# EAGLE board MucDuino_Banana (EAGLE 6.3)
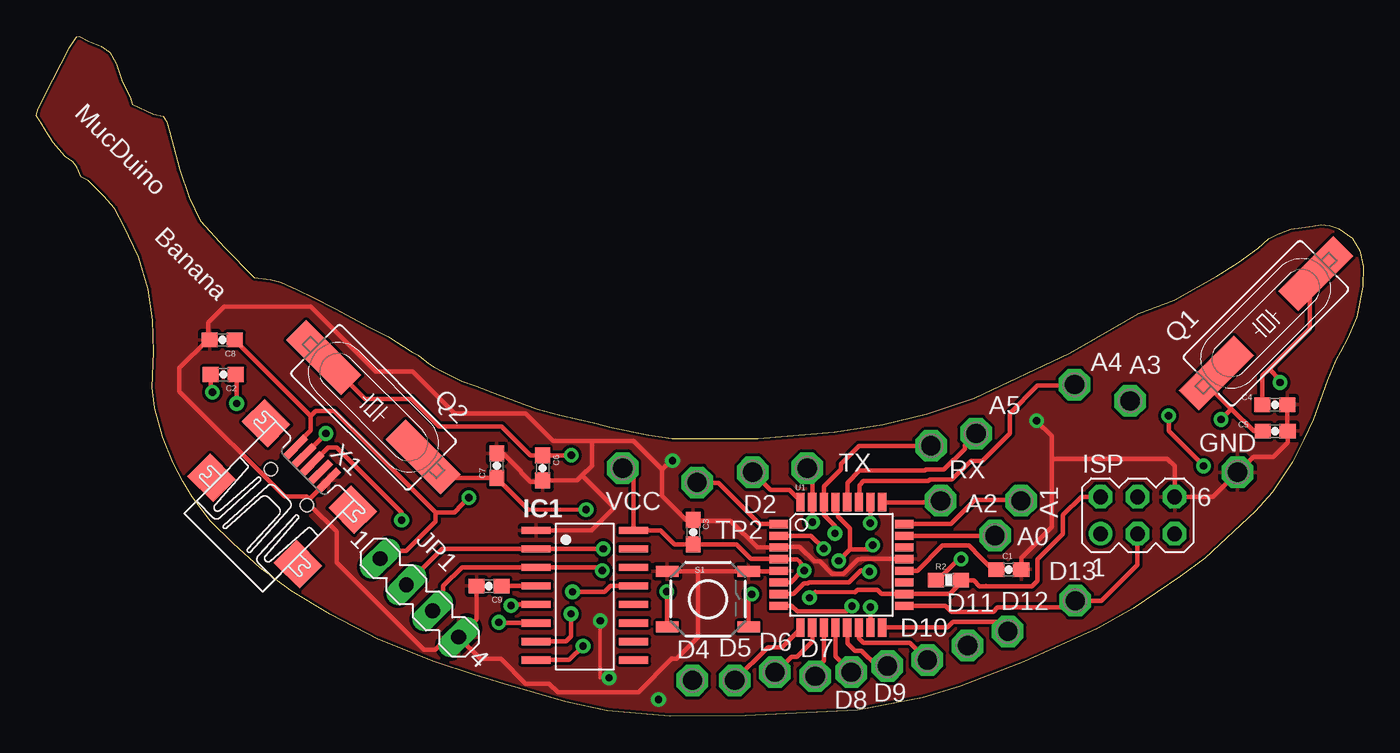
[diagram p0: board, top side]
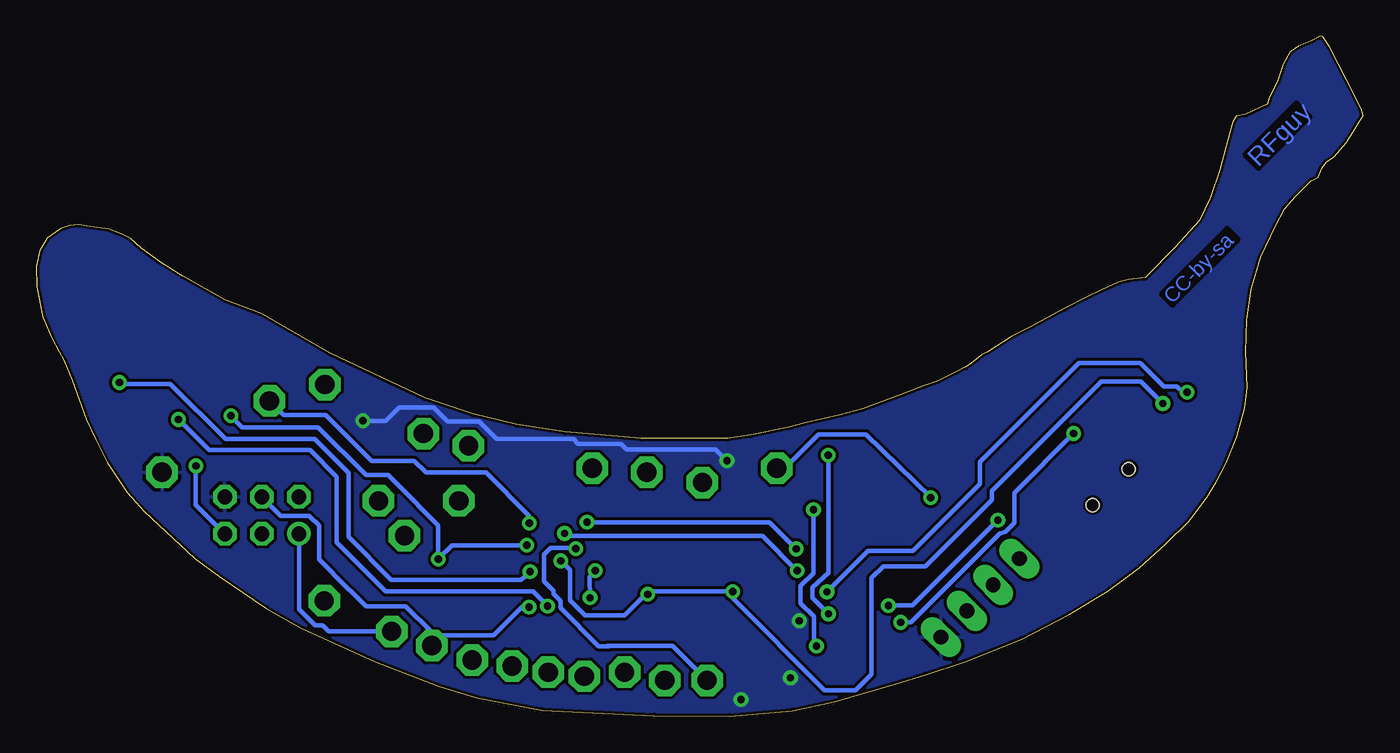
[diagram p1: board, bottom side, seen from below]

Size 91.01 x 46.65 mm. Coordinates in mm from the lower left corner, seen from the top.
Outline: 12.93,32.15 14.95,30.1 16.08,29.96 16.74,29.79 17.9,29.27 19.02,28.72 20.48,27.96 22.9,26.69 24.11,26.06 25.77,25 26.2,24.78 26.89,24.22 27.28,23.96 27.87,23.64 29.15,23.02 30.15,22.66 31.67,22.09 34.35,21.1 35.88,20.68 38.27,20.14 39.44,19.83 42,19.3 43.59,19.06 49.49,19.06 54.74,19.5 58.08,20.01 61.06,20.73 64.36,21.83 70.89,24.91 75.61,27.64 78.05,28.57 80.97,30.19 82.44,31.13 83.82,32.11 84.54,32.79 85.17,33.09 86.05,33.43 87.56,33.65 88.12,33.72 88.72,33.68 89.34,33.47 90.27,32.8 90.8,31.97 91.01,30.85 90.99,29.48 90.58,27.38 89.97,25.95 89.45,25.01 89.13,24.43 88.57,23.04 87.6,20.35 86.95,19 86.16,17.41 84.78,15.37 83.63,14.05 80.14,10.84 78.48,9.61 75.24,7.41 72.83,6.03 67.73,3.72 63.38,2.04 60.79,1.26 56.33,0.41 48.63,0.04 43.45,0 39.16,0.38 36.3,0.98 32.05,2.22 30.03,2.85 27.3,3.75 23.44,5.29 20.14,7 17.46,8.6 15.35,10.18 13.52,11.82 11.97,13.36 10.67,15.06 10.06,16.09 9.38,17.37 8.65,19.17 8.1,21.16 7.94,22.57 8.04,25 7.99,27.18 7.68,29.31 7,31.51 5.99,33.68 5.37,34.85 4.63,35.68 3.78,36.5 3.55,36.76 3.07,36.99 2.81,37.65 2.52,38.03 1.97,38.39 1.14,39.35 0.66,40.1 0.26,40.79 0,41.21 0.11,41.68 1.11,43.65 2.28,45.9 2.77,46.64 2.94,46.65 3.57,46.33 4.45,45.97 5.03,45.56 5.48,44.77 5.89,43.55 6.42,42.48 6.57,42 8.04,41.31 8.69,41.19 8.95,40.79 9.13,40.07 9.81,37.5 10.48,35.6 11.25,34 12.93,32.15
Copper layers (1*16): Top 0.035mm / dielectric 1.5mm / Bottom 0.035mm
Design rules "SparkFun-2-layer *": minimum track width 7mil, minimum drill 15mil, track to track 8mil, track to pad 8mil, pad to pad 8mil, via to via 8mil, smd to smd 8mil, copper to edge 8mil, drill to drill 8mil, minimum pad ring 12mil, minimum via ring 10mil, stop-mask expansion 4mil, vias tented up to drill 20mil, thermal gap 10mil
Net classes: 0 default: width 0.203 mm; 1 vcc: width 0.254 mm

## Footprints (pad centres in the part's own frame; a part is rotated, then mirrored left to right if it is on the bottom)
P1-13 = drill 1.321 pad 2.159 octagon: TP 0,0
0603-CAP = smd 1.1 x 1: 1 -0.85,0; 2 0.85,0
SOP16-209MM = smd 2 x 0.5: P$1 -3.34,4.54; P$2 -3.34,3.27; P$3 -3.34,2; P$4 -3.34,0.73; P$5 -3.34,-0.54; P$6 -3.34,-1.81; P$7 -3.34,-3.08; P$8 -3.34,-4.35; P$9 3.34,-4.35; P$10 3.34,-3.08; P$11 3.34,-1.81; P$12 3.34,-0.54; P$13 3.34,0.73; P$14 3.34,2; P$15 3.34,3.27; P$16 3.34,4.54
MA03-2 = drill 1.016: 1 -2.54,-1.27 | drill 1.016 octagon: 2 -2.54,1.27; 3 0,-1.27; 4 0,1.27; 5 2.54,-1.27; 6 2.54,1.27
MA04-1 = drill 1.016 long: 1 -3.81,0; 2 -1.27,0; 3 1.27,0; 4 3.81,0
HC49UP = smd 5.334 x 1.93: 1 -4.826,0; 2 4.826,0
0603-RES = smd 1.1 x 1: 1 -0.85,0; 2 0.85,0
TACTILE-SWITCH-SMD-ALT01 = smd 1.524 x 0.762: 1 -2.794,1.905; 2 2.794,1.905; 3 -2.794,-1.905; 4 2.794,-1.905
TQFP32-08 = smd 1.27 x 0.559: 1 -4.293,2.8; 2 -4.293,2; 3 -4.293,1.2; 4 -4.293,0.4; 5 -4.293,-0.4; 6 -4.293,-1.2; 7 -4.293,-2; 8 -4.293,-2.8; 17 4.293,-2.8; 18 4.293,-2; 19 4.293,-1.2; 20 4.293,-0.4; 21 4.293,0.4; 22 4.293,1.2; 23 4.293,2; 24 4.293,2.8 | smd 0.559 x 1.27: 9 -2.8,-4.293; 10 -2,-4.293; 11 -1.2,-4.293; 12 -0.4,-4.293; 13 0.4,-4.293; 14 1.2,-4.293; 15 2,-4.293; 16 2.8,-4.293; 25 2.8,4.293; 26 2,4.293; 27 1.2,4.293; 28 0.4,4.293; 29 -0.4,4.293; 30 -1.2,4.293; 31 -2,4.293; 32 -2.8,4.293
UX60-MB-5ST = smd 2 x 0.5: 1 2.25,1.6; 2 2.25,0.8; 3 2.25,0; 4 2.25,-0.8; 5 2.25,-1.6 | smd 2.2 x 2.5: M1 -3.3,-4.2; M2 -3.3,4.2; M3 2,4.2; M4 2,-4.2 | hole 0.9: 0,-1.75; 0,1.75

## Placement (x,y rotation side)
A0  TPPAD1-13  [P1-13]  65.76,12.4 270 top
A1  TPPAD1-13  [P1-13]  67.54,14.78 270 top
A2  TPPAD1-13  [P1-13]  62.04,14.78 270 top
A3  TPPAD1-13  [P1-13]  75.02,21.64 270 top
A4  TPPAD1-13  [P1-13]  71.22,22.76 270 top
A5  TPPAD1-13  [P1-13]  64.46,19.4 270 top
C1  0.1uF  [0603-CAP]  66.7,10.06 180 top
C2  0.1uF  [0603-CAP]  12.82,23.45 180 top
C3  0.1uF  [0603-CAP]  45.05,12.63 270 top
C4  18p  [0603-CAP]  84.96,21.38 0 top
C5  18p  [0603-CAP]  84.98,19.56 0 top
C6  18p  [0603-CAP]  34.72,17.03 270 top
C7  18p  [0603-CAP]  31.58,17.19 90 top
C8  0.1uF  [0603-CAP]  12.75,25.82 180 top
C9  0.1uF  [0603-CAP]  31.05,8.93 180 top
D2  TPPAD1-13  [P1-13]  49.14,16.74 270 top
D4  TPPAD1-13  [P1-13]  45,2.46 270 top
D5  TPPAD1-13  [P1-13]  47.9,2.46 270 top
D6  TPPAD1-13  [P1-13]  50.66,3.02 270 top
D7  TPPAD1-13  [P1-13]  53.42,2.74 270 top
D8  TPPAD1-13  [P1-13]  55.9,3.02 270 top
D9  TPPAD1-13  [P1-13]  58.38,3.45 270 top
D10  TPPAD1-13  [P1-13]  61.12,3.86 270 top
D11  TPPAD1-13  [P1-13]  63.88,4.84 270 top
D12  TPPAD1-13  [P1-13]  66.64,5.82 270 top
D13  TPPAD1-13  [P1-13]  71.27,7.92 270 top
GND  TPPAD1-13  [P1-13]  82.4,16.74 270 top
IC1  [SOP16-209MM]  37.62,8.21 0 top
ISP  [MA03-2]  75.54,13.79 0 top
JP1  [MA04-1]  26.27,8.12 315 top
Q1  16 MHz  [HC49UP]  84.35,26.97 45 top
Q2  12 MHz  [HC49UP]  23.13,21.19 135 top
R2  10K  [0603-RES]  62.57,9.35 0 top
RX  TPPAD1-13  [P1-13]  61.37,18.56 270 top
S1  Reset  [TACTILE-SWITCH-SMD-ALT01]  46.07,8.03 0 top
TP2  TPPAD1-13  [P1-13]  45.32,16.04 270 top
TX  TPPAD1-13  [P1-13]  52.87,17.02 270 top
U1  ATMEGA328  [TQFP32-08]  55.22,10.38 0 top
VCC  TPPAD1-13  [P1-13]  40.22,17.02 270 top
X1  MINI-USB-UX60-MB-5ST  [UX60-MB-5ST]  17.31,15.73 45 top

## Library data of the parts
A0 A1-A5 D2 D4-D13 GND RX TP2 TX VCC = testpad
C1-C9 R2 U1 = SparkFun
IC1 = densikit
ISP JP1 = con-lstb; OC_FARNELL: unknown; OC_NEWARK: unknown
Q1 Q2 = crystal; OC_FARNELL: unknown; OC_NEWARK: unknown
S1 = Testing
X1 = con-hirose; OC_FARNELL: unknown; OC_NEWARK: unknown

## Nets
A0: A0.TP U1.23
A1: A1.TP U1.24
A2: A2.TP U1.25
A3: A3.TP U1.26
A4: A4.TP U1.27
A5: A5.TP U1.28
A6: U1.19
A7: U1.22
AREF: C1.2 U1.20
D2: D2.TP U1.32
D3: TP2.TP U1.1
D4: D4.TP U1.2
D5: D5.TP U1.9
D6: D6.TP U1.10
D7: D7.TP U1.11
D8: D8.TP U1.12
D9: D9.TP U1.13
D10: D10.TP U1.14
DTR: C2.2 IC1.P$13
GND [vcc]: C1.1 C3.1 C4.2 C5.2 C6.2 C7.2 C8.2 C9.2 GND.TP IC1.P$1 ISP.6 JP1.4 S1.1 S1.2 U1.3 U1.5 U1.21 X1.5
MISO: D12.TP ISP.1 U1.16
MOSI: D11.TP ISP.4 U1.15
N$1: C5.1 Q1.1 U1.8
N$2: C4.1 Q1.2 U1.7
N$3: C9.1 IC1.P$4
N$5: C6.1 IC1.P$7 Q2.2
N$6: C7.1 IC1.P$8 Q2.1
N$8: IC1.P$5 X1.3
N$9: IC1.P$6 X1.2
RESET: C2.1 ISP.5 R2.1 S1.3 S1.4 U1.29
RXI: IC1.P$3 JP1.3 RX.TP U1.30
SCK: D13.TP ISP.3 U1.17
TXO: IC1.P$2 JP1.2 TX.TP U1.31
VCC: C3.2 C8.1 IC1.P$16 ISP.2 JP1.1 R2.2 U1.4 U1.6 U1.18 VCC.TP X1.1

## Tracks (layer width: path | path; a pad name or v marks a point on that pad's centre or on a via)
A0
  Top 0.305: U1.23 65.74,12.38 A0.TP
A1
  Top 0.305: U1.24 62.72,13.18 64.37,14.83 67.49,14.83 A1.TP
A2
  Top 0.305: U1.25 62.01,14.67 62.16,14.82 62.08,14.82 A2.TP
A3  (via drill 0.5)
  Top 0.305: U1.26 57.22,13.26 v57.2,13.24
  Bottom 0.305: v57.2,13.24 57.2,13.74 60.18,16.72 64.29,16.72 65.09,17.52 68.03,17.52 71.18,20.67 74.05,20.67 A3.TP
A4
  Top 0.305: U1.27 56.42,14.79 | 56.42,14.79 56.42,15.05 | A4.TP 71.14,22.68 68.68,22.68 66.79,20.79 66.79,19.42 64.9,17.53 64.09,17.53 62.81,16.25 61.28,16.25 61.18,16.15 56.75,16.15 56.45,15.85 56.45,14.82 56.42,14.79
A5
  Top 0.305: U1.28 55.62,16.01 56.47,16.86 60.96,16.86 61.03,16.93 62.27,16.93 63.69,18.35 63.69,18.63 A5.TP
AREF
  Top 0.305: U1.20 60.43,9.98 62.16,11.71 63.96,11.71 64.78,10.89 65.71,9.94 C1.2
D2
  Top 0.305: U1.32 52.42,14.78 51.66,15.54 50.34,15.54 D2.TP
D3
  Top 0.305: U1.1 49.62,13.18 46.78,16.02 45.34,16.02 TP2.TP
D4  (via drill 0.5)
  Top 0.305: U1.2 53.14,12.38 v54.01,11.51
  Bottom 0.305: v54.01,11.5 v54.01,11.51 54.04,11.54 55.74,11.54 56.18,11.1 56.18,9.27 55.53,8.62 55.53,8.4 55.06,7.93 55.06,7.43 52.44,4.81 51.68,4.81 51.67,4.82 | 51.82,4.82 51.67,4.82 | 51.67,4.82 47.36,4.82 D4.TP
D5
  Top 0.305: U1.9 52.42,6.01 51.15,4.74 50.18,4.74 D5.TP
D6
  Top 0.305: U1.10 53.22,5.13 52.17,4.08 51.79,4.08 50.61,2.9 50.61,2.97 D6.TP
D7
  Top 0.305: U1.11 54.02,3.8 53.41,3.19 D7.TP
D8
  Top 0.305: U1.12 54.82,4.1 D8.TP
D9
  Top 0.305: U1.13 55.62,5 55.64,5 56.14,4.5 56.6,4.5 57.65,3.45 58.35,3.45 58.37,3.43 58.25,3.43 D9.TP
D10
  Top 0.305: U1.14 56.42,5.34 56.72,5.04 59.94,5.04 D10.TP
DTR  (via drill 0.5)
  Top 0.305: IC1.P$13 39.38,8.94 38.98,8.54 v36.78,8.54 | v12.08,22.24 11.97,22.35 C2.2
  Bottom 0.305: v36.78,8.54 33.98,11.34 30.88,11.34 26.28,15.94 26.28,17.44 19.48,24.24 15.28,24.24 13.68,22.64 12.78,22.64 12.38,22.24 v12.08,22.24
GND  (via drill 0.5)
  Top 0.254: v39.28,2.64 38.68,2.64 v38.68,6.54
  Top 0.305: C7.2 32.01,18.04 33.26,16.79 33.26,16.73 33.9,16.09 34.5,16.09 | 34.5,16.09 34.63,16.09 C6.2 | C9.2 30.2,6.66 JP1.4 | JP1.4 28.24,5.43 27.35,4.54 26.59,4.54 20.58,10.55 20.58,12.68 18.79,14.47 18.79,14.82 | 18.79,14.82 18.79,14.94 X1.5 | U1.3 50.68,11.58 | 50.68,11.58 49.47,11.58 47.63,13.42 44.97,13.42 44.94,13.39 44.96,13.39 C3.1 44.57,13.48 42.93,15.12 42.93,16.94 | 42.93,16.94 40.97,18.9 38.11,18.9 | 37.43,16.51 38.11,17.19 38.11,18.9 | 37.43,16.51 37.09,16.17 34.58,16.17 34.5,16.09 | C8.2 11.79,25.82 | 11.79,25.82 11.74,25.82 9.8,23.88 9.8,22.3 17.02,15.08 18.53,15.08 18.79,14.82 | IC1.P$1 38.07,12.75 39.52,14.2 39.52,14.42 37.43,16.51 | 38.11,18.9 35.43,18.9 33.57,20.76 28.7,20.76 25.81,23.65 23.28,23.65 18.81,28.12 12.88,28.12 11.77,27.01 11.77,25.84 11.79,25.82 | 43.6,3.96 43.58,3.94 | 43.58,3.94 41.29,1.65 35.77,1.65 35.18,2.24 33.57,2.24 31.87,3.94 30.46,3.94 JP1.4 | U1.5 51,10.05 51.13,10.05 51.02,9.94 S1.2 45.48,9.94 | S1.1 45.48,9.94 | 43.58,3.94 43.9,3.94 45.39,5.43 45.39,9.85 45.48,9.94 | U1.21 56.56,10.78 56.55,10.77 56.36,10.77 55.37,9.78 54.58,9.78 53.74,10.62 53.36,10.62 52.36,11.62 50.72,11.62 50.68,11.58 | C1.1 67.55,10.87 69.66,12.98 69.66,17.8 | 69.66,17.8 69.66,19.22 v68.61,20.27 | v43.63,17.53 43.52,17.53 42.93,16.94 | C4.2 85.81,19.58 C5.2 85.83,18.77 84.86,17.8 83.47,17.8 82.26,16.59 82.26,16.6 GND.TP 80.72,15.06 ISP.6 78.08,17.17 77.58,17.67 69.79,17.67 69.66,17.8
  Bottom 0.305: v68.61,20.27 67.05,20.27 66.13,21.19 63.77,21.19 62.82,20.24 60.66,20.24 59.43,19.01 54.18,19.01 53.86,18.69 50.89,18.69 50.52,18.32 44.42,18.32 v43.63,17.53
  other vias: 42.68,1.14
  pour Bottom: -3.22,49.14 97.08,49.14 97.08,-3.86 -3.22,-3.86
  pour Top: -1.72,51.84 97.28,51.84 97.28,-4.46 -1.72,-4.46
MISO
  Top 0.305: U1.16 62.48,6.09 62.86,6.47 65.99,6.47 D12.TP
  Bottom 0.305: D12.TP 70.98,5.82 71.38,6.22 71.89,6.22 72.99,7.32 ISP.1
MOSI  (via drill 0.5)
  Top 0.305: U1.15 57.22,7.48 v57.21,7.49
  Bottom 0.305: v57.21,7.49 57.71,7.49 59.64,5.56 63.16,5.56 D11.TP 63.88,5.74 65.67,7.53 68.4,7.53 70.65,9.78 70.65,9.79 71.63,10.77 71.63,13.08 72.3,13.75 74.27,13.75 75.67,15.15 75.67,15 75.61,14.94 75.61,14.99 ISP.4
N$1  (via drill 0.5)
  Top 0.305: C5.1 83.51,19.56 81.98,21.09 | 81.98,21.09 80.19,22.88 80.26,22.88 Q1.1 | v81.26,20.36 81.26,20.38 81.98,21.09 | U1.8 51.81,7.58 52.2,7.19 55.57,7.19 v55.94,7.56
  Bottom 0.305: v55.94,7.56 56.09,7.7 56.09,7.72 56.95,8.58 67.04,8.58 70.4,11.94 70.4,16.41 72.25,18.26 79.16,18.26 v81.26,20.36
N$2  (via drill 0.5)
  Top 0.305: C4.1 84.11,23.37 84.57,23.83 | 84.57,23.83 87.35,26.61 87.35,30.3 87.46,30.41 87.72,30.41 87.89,30.24 87.68,30.24 87.63,30.29 87.67,30.29 Q1.2 | v85.31,22.9 85.31,23.09 84.57,23.83 | v57.15,9.92 57.05,10.02 56.57,10.02 55.73,9.18 53.01,9.18 52.94,9.11 52.64,9.11 51.92,8.39 U1.7
  Bottom 0.305: v57.15,9.92 57.49,9.61 57.75,9.36 66.68,9.37 69.61,12.3 69.61,16.7 71.92,19.01 78.03,19.01 81.82,22.8 85.21,22.8 v85.31,22.9
N$3
  Top 0.305: C9.1 IC1.P$4
N$5  (via drill 0.5)
  Top 0.305: Q2.2 19.61,24.71 19.57,24.71 19.79,24.49 19.82,24.49 22.54,21.77 25.73,21.77 27.63,19.87 31.92,19.87 33.91,17.88 C6.1 34.87,17.88 34.9,17.91 v36.7,17.91 | IC1.P$7 36.32,5.13 36.68,5.49 v36.68,7.02
  Bottom 0.305: v36.68,7.02 37.78,8.12 37.78,8.84 36.68,9.84 36.68,17.74 36.7,17.76 v36.7,17.91
N$6  (via drill 0.5)
  Top 0.305: Q2.1 27.98,16.34 C7.1 33.77,14.15 v37.7,14.18 | IC1.P$8 36.55,3.86 v37.5,4.81
  Bottom 0.305: 37.5,14.15 v37.7,14.18 37.7,9.82 38.58,8.94 38.58,7.74 37.68,6.84 37.68,4.99 v37.5,4.81
N$8  (via drill 0.5)
  Top 0.305: IC1.P$5 32.63,7.67 v32.56,7.6 | v25.05,13.46 25.05,13.98 20.59,18.44 20.02,18.44 X1.3
  Bottom 0.305: v32.56,7.6 30.91,7.6 v25.05,13.46
N$9  (via drill 0.5)
  Top 0.305: IC1.P$6 31.76,6.4 v31.72,6.44 | v19.86,19.4 19.69,19.24 X1.2
  Bottom 0.305: v31.72,6.44 31.02,6.44 24.92,12.54 24.53,12.64 23.91,13.26 23.91,15.34 v19.86,19.4
RESET  (via drill 0.5)
  Top 0.305: U1.29 54.76,14.61 54.76,14.07 54.99,13.84 54.99,13.72 55.82,12.89 55.82,11.46 | 43.22,8.58 v43.24,8.56 43.27,8.53 S1.3 | v13.74,21.46 13.74,23.38 C2.1 | S1.4 48.86,8.16 v49.07,8.37 | 55.82,11.46 v55.04,10.66 | 55.82,11.46 57.09,11.46 v57.37,11.74 | R2.1 61.85,9.35 63.37,10.86 v63.44,10.79 | v77.67,20.62 77.67,19.57 v80.07,17.17
  Bottom 0.305: v49.07,8.37 49.22,8.37 | v13.74,21.46 15.26,22.98 17.94,22.98 25.47,15.45 25.47,14.85 30.02,10.3 32.91,10.3 33.71,9.5 33.71,2.89 34.81,1.79 36.94,1.79 43.24,8.09 v43.24,8.56 49.03,8.56 49.22,8.37 | v55.04,10.66 54.42,10.06 54.42,7.96 53.37,6.91 50.68,6.91 49.22,8.37 | v57.37,11.74 62.49,11.74 v63.44,10.79 63.44,13.08 64.85,14.49 64.85,14.52 66.88,16.55 68.39,16.55 71.67,19.83 76.88,19.83 v77.67,20.62 | v80.07,17.17 80.07,14.51 ISP.5
RXI  (via drill 0.5)
  Top 0.305: JP1.3 27.91,7.96 27.91,8.93 29.19,10.21 IC1.P$3 38.59,10.21 v38.81,9.99 | v54.78,12.55 54.78,13.05 54.01,13.82 U1.30 54.02,15.77 55.2,16.95 55.2,17.3 56.44,18.54 61.35,18.54 RX.TP
  Bottom 0.305: v38.81,9.99 v38.82,9.99 41.2,12.37 54.6,12.37 v54.78,12.55
SCK
  Top 0.305: ISP.3 75.54,10.4 73.06,7.92 D13.TP 70.81,7.46 65.93,7.46 65.64,7.17 62.77,7.17 62.36,7.58 U1.17
TXO  (via drill 0.5)
  Top 0.305: TX.TP 53.22,16.67 U1.31 53.22,13.33 v53.24,13.31 | JP1.2 27.83,11.48 IC1.P$2 v38.89,11.48
  Bottom 0.305: v53.24,13.31 40.72,13.31 v38.89,11.48
VCC  (via drill 0.5)
  Top 0.305: X1.1 17.77,18.58 18.81,19.62 18.81,20.61 | 18.81,20.61 C8.1 | 52.46,9.89 52.46,10.49 52.33,10.62 52.33,10.63 52.18,10.78 U1.4 49.03,10.79 48.04,11.78 C3.2 45.09,11.74 45.28,11.74 45.22,11.8 43.78,11.8 42.83,12.75 IC1.P$16 40.96,16.28 VCC.TP | JP1.1 24.02,10.82 24.56,11.36 25.37,11.36 27.37,13.36 27.37,13.98 | 27.37,13.98 20.41,20.94 19.14,20.94 18.81,20.61 | v29.66,15 28.69,14 27.37,13.98 | ISP.2 71.67,15.06 70.41,13.8 70.41,12.52 68.66,10.77 68.66,9.28 68.54,9.16 68.52,9.16 68.28,8.92 65.16,8.92 | 65.16,8.92 65.15,8.93 | 63.54,9.25 62.67,8.38 U1.18 57.97,8.38 57.68,8.67 56.31,8.67 56.14,8.5 53.44,8.52 v53.03,8.13 | 63.54,9.25 63.52,9.25 R2.2 | 65.16,8.92 64.7,8.92 64.3,9.32 63.61,9.32 63.54,9.25 | v52.68,9.99 52.56,9.99 52.46,9.89 | U1.6 51.75,9.18 52.46,9.89
  Bottom 0.305: VCC.TP 39.69,17.02 37.36,19.35 34.11,19.35 v29.66,15 | v53.03,8.13 53.06,9.58 v52.68,9.99

## Text on the board
Bottom: RFguy | CC-by-sa
tNames: MucDuino | Banana
tValues: Valid combinations: | 168V / 3.3V Reg / 8MHz | 168 / 5V Reg / 16MHz | 168 / 5V Reg / 20MHz | Mark back accordingly | Arduino Pro Mini